# Altium PCB transboard-v1.1.PcbDoc
Units mil, origin at the board's own origin, x right, y up, seen from the top; angles counter-clockwise.
Board outline 2670 x 2110 mil, 2 copper layers (Top Layer, Bottom Layer); 13 components, 17 nets, 118 pads, 1 vias.
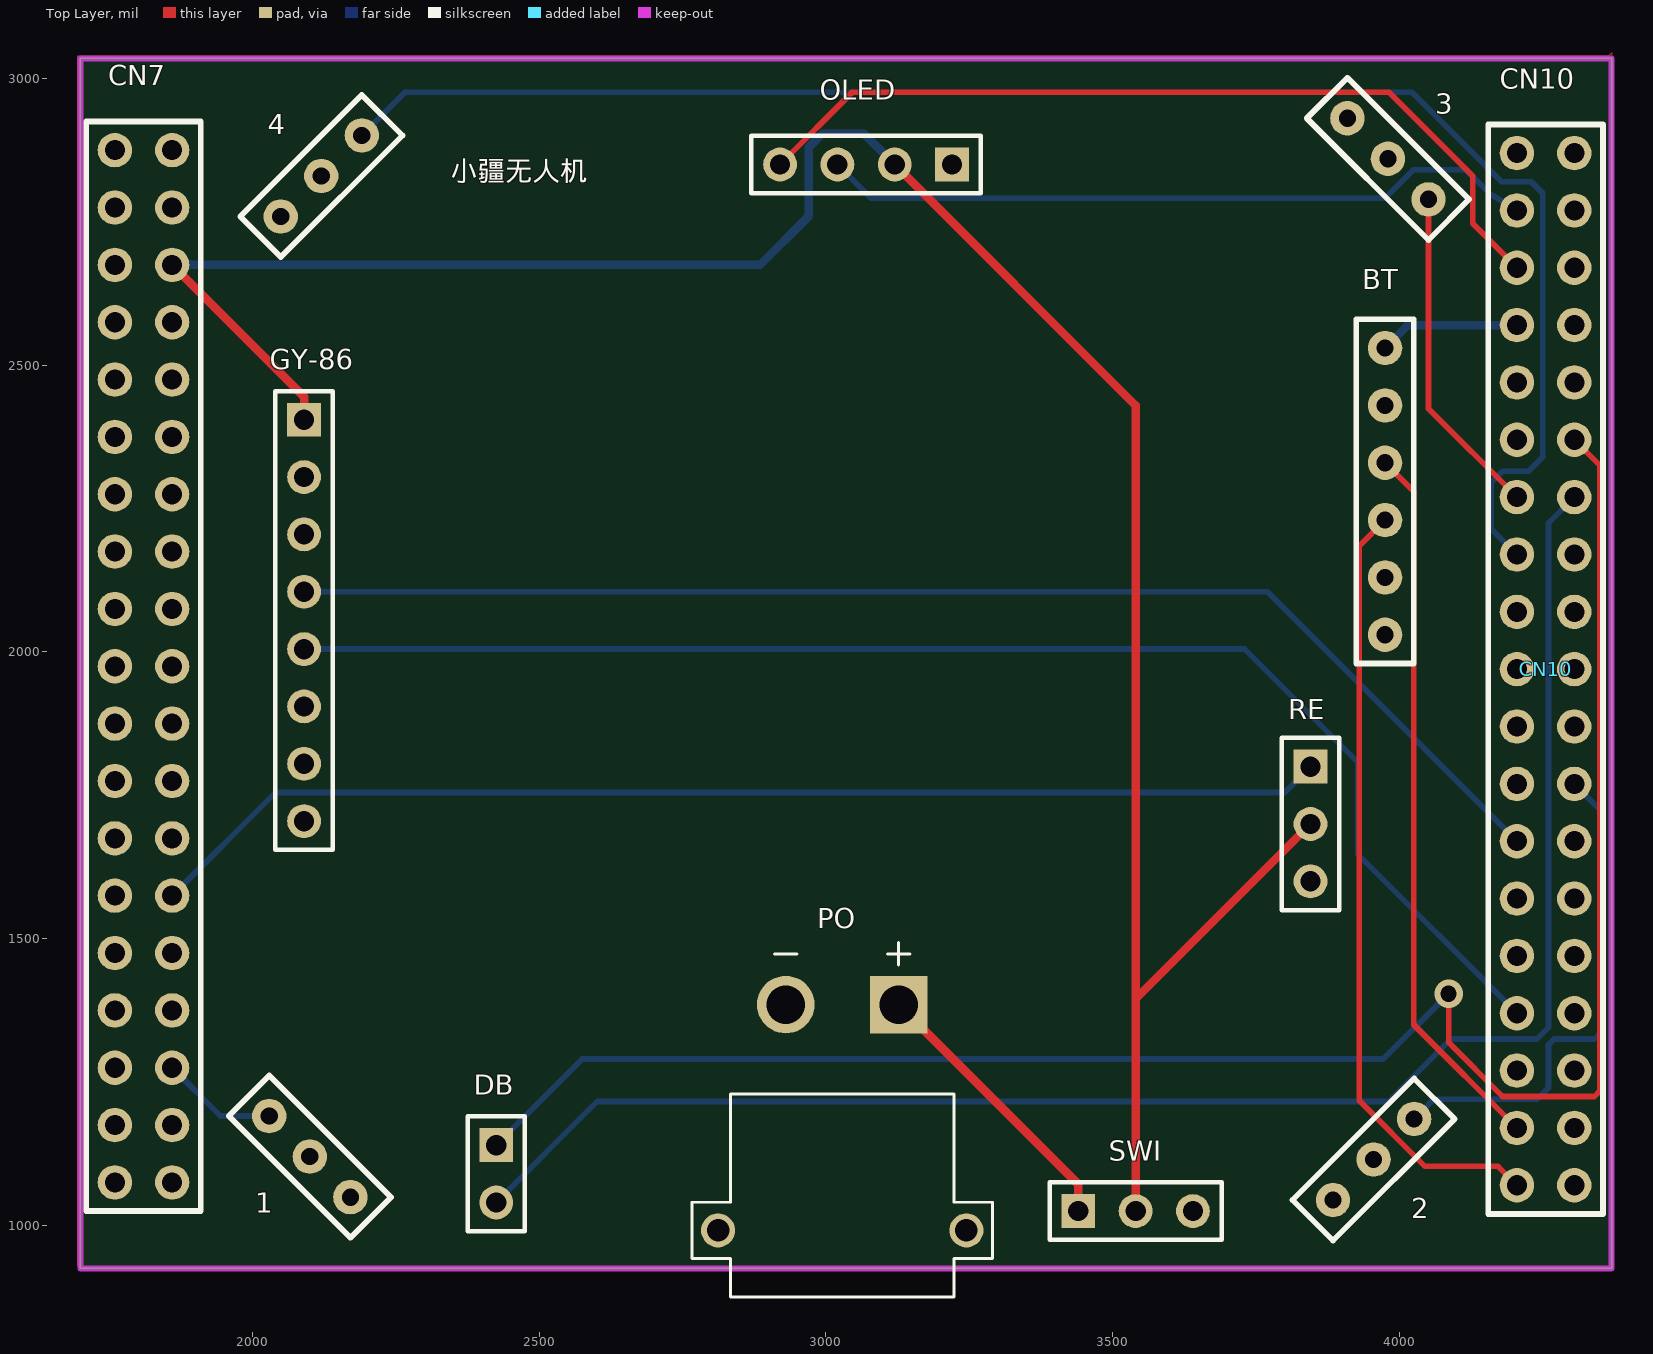
[diagram p0: Top Layer view]
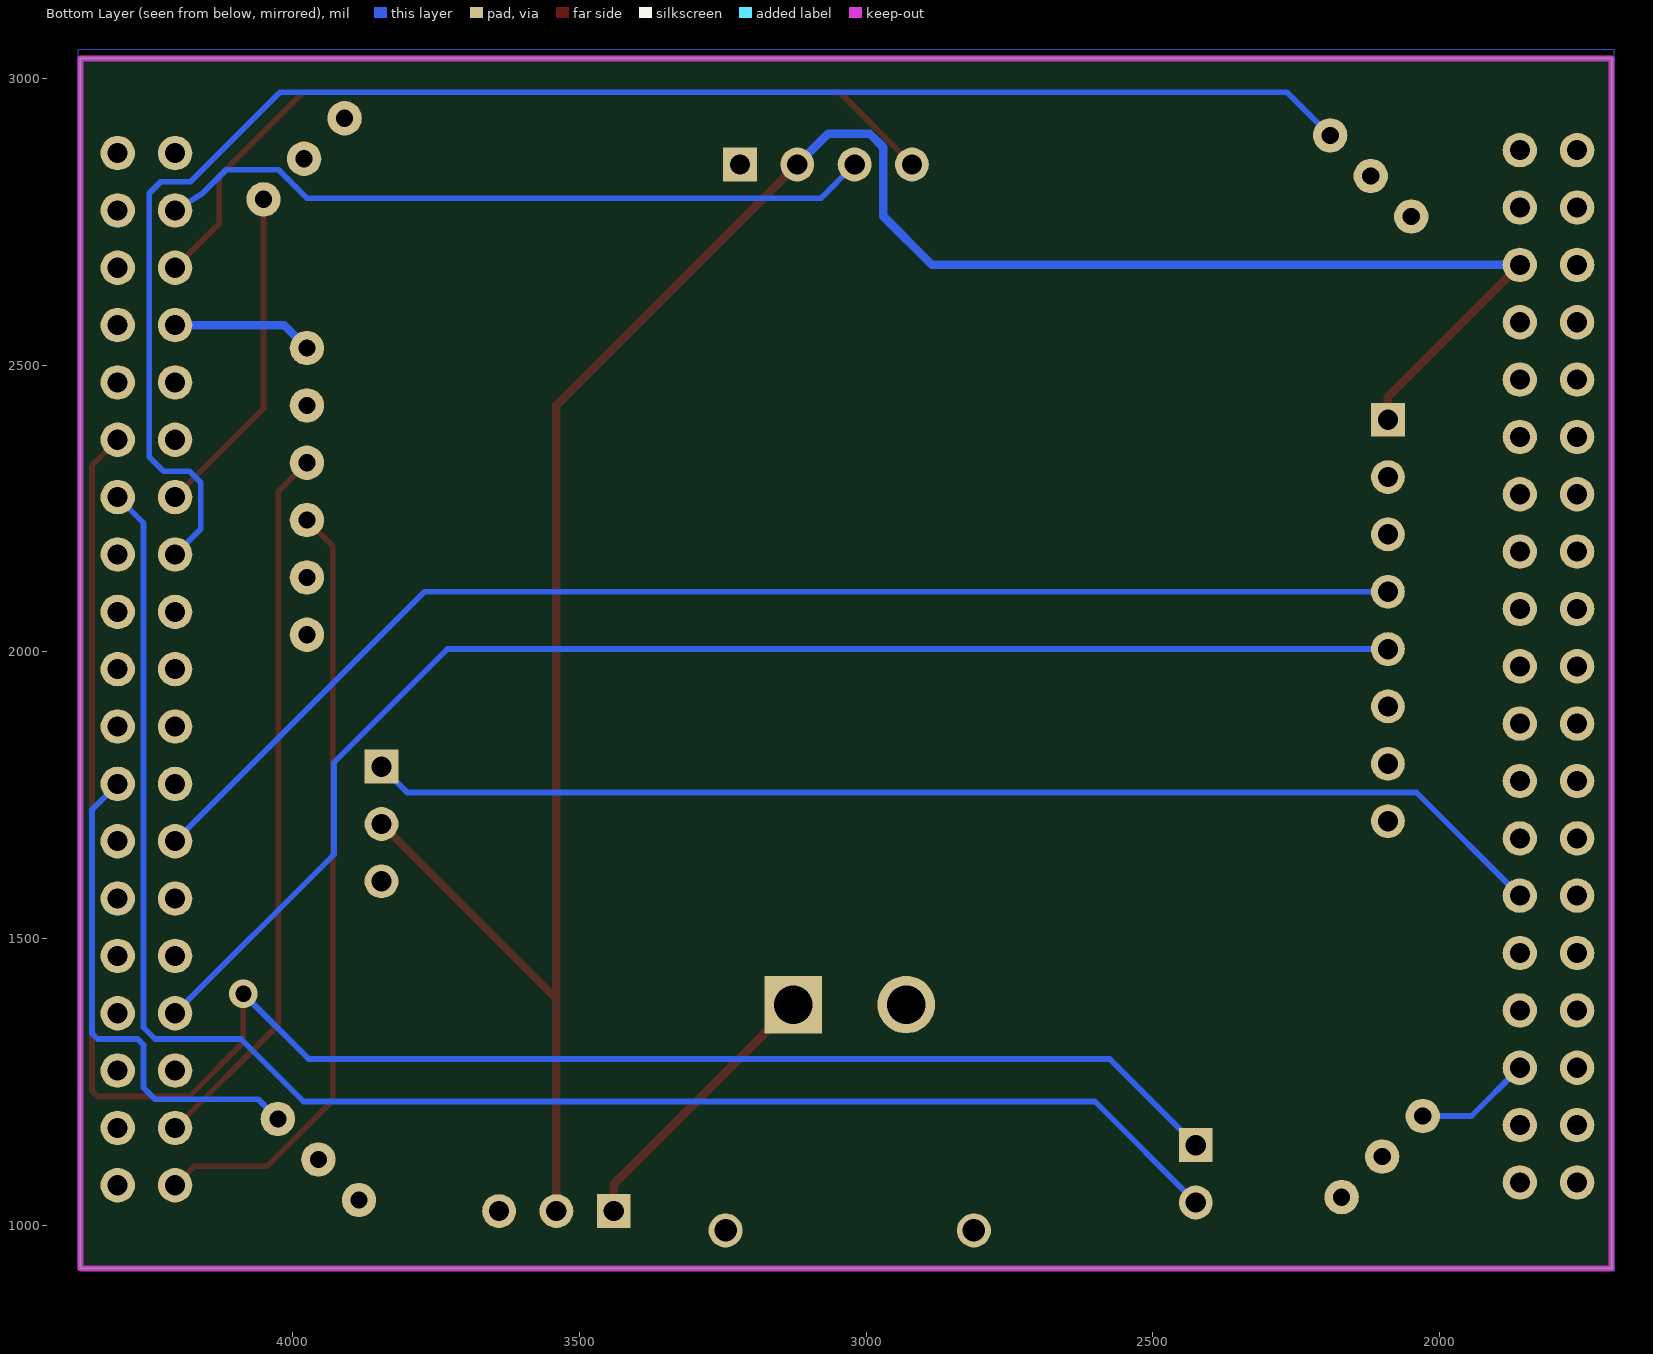
[diagram p1: Bottom Layer view, seen from below]

## Layer stack, top to bottom
Top Solder: solder mask 0.4, Solder Resist, Dk 3.5
Top Layer: signal copper 1.4
Dielectric 1: dielectric 12.6, FR-4, Dk 4.8
Bottom Layer: signal copper 1.4
Bottom Solder: solder mask 0.4, Solder Resist, Dk 3.5

## Board outline
1700,925 1700,3035 4370,3035 4370,925

## Design rules (kind name [scope] priority, off if disabled: settings)
AssemblyTestPointUsage [All] p0: scope1count=1 scope1_0_kind=Board scope1_0_value=Board scope2count=1 scope2_0_kind=Board scope2_0_value=Board commentlength=0
AssemblyTestpoint [All] p0: scope1count=1 scope1_0_kind=Board scope1_0_value=Board scope2count=1 scope2_0_kind=Board scope2_0_value=Board commentlength=0
Clearance [All] p0: scope1count=1 scope1_0_kind=Board scope1_0_value=Board scope2count=1 scope2_0_kind=Board scope2_0_value=Board commentlength=0 gap=10
Clearance [All] p1: gap=10 ignorepadtopadclearanceinfootprint=FALSE
ComponentClearance [All] p0: scope1count=1 scope1_0_kind=Board scope1_0_value=Board scope2count=1 scope2_0_kind=Board scope2_0_value=Board commentlength=0 gap=10 collisioncheckmode=3
DiffPairsRouting [All] p0: scope1count=1 scope1_0_kind=Board scope1_0_value=Board scope2count=1 scope2_0_kind=Board scope2_0_value=Board commentlength=0
FabricationTestPointUsage [All] p0: scope1count=1 scope1_0_kind=Board scope1_0_value=Board scope2count=1 scope2_0_kind=Board scope2_0_value=Board commentlength=0 valid=0 allowmultiple=FALSE
FabricationTestpoint [All] p0: scope1count=1 scope1_0_kind=Board scope1_0_value=Board scope2count=1 scope2_0_kind=Board scope2_0_value=Board commentlength=0 side=3 testpointundercomponent=TRUE minsize=40 maxsize=100 preferedsize=60 minholesize=0 maxholesize=40 preferedholesize=32 testpointgrid=1
FanoutControl Fanout_BGA [All] p0 off: scope1count=1 scope1_0_kind=Board scope1_0_value=Board scope2count=1 scope2_0_kind=Board scope2_0_value=Board commentlength=69 // Protel DXP Scope 1 Expression Was: IsBGA   Fanout_BGA (Default Rule)
FanoutControl Fanout_LCC [All] p0 off: scope1count=1 scope1_0_kind=Board scope1_0_value=Board scope2count=1 scope2_0_kind=Board scope2_0_value=Board commentlength=69 // Protel DXP Scope 1 Expression Was: IsLCC   Fanout_LCC (Default Rule)
FanoutControl Fanout_SOIC [All] p0 off: scope1count=1 scope1_0_kind=Board scope1_0_value=Board scope2count=1 scope2_0_kind=Board scope2_0_value=Board commentlength=71 // Protel DXP Scope 1 Expression Was: IsSOIC   Fanout_SOIC (Default Rule)
FanoutControl Fanout_Small [All] p0 off: scope1count=1 scope1_0_kind=Board scope1_0_value=Board scope2count=1 scope2_0_kind=Board scope2_0_value=Board commentlength=84 // Protel DXP Scope 1 Expression Was: (CompPinCount < 5)   Fanout_Small (Default Rule)
FanoutControl Fanout_Default [All] p0: scope1count=1 scope1_0_kind=Board scope1_0_value=Board scope2count=1 scope2_0_kind=Board scope2_0_value=Board commentlength=30 // Fanout_Default (Default Rule)
Height [All] p0: scope1count=1 scope1_0_kind=Board scope1_0_value=Board scope2count=1 scope2_0_kind=Board scope2_0_value=Board commentlength=0
HoleSize [All] p0: scope1count=1 scope1_0_kind=Board scope1_0_value=Board scope2count=1 scope2_0_kind=Board scope2_0_value=Board commentlength=0 absolutevalues=TRUE maxlimit=100 minlimit=1 maxpercent=80.000 minpercent=20.000
HoleToHoleClearance [All] p0: scope1count=1 scope1_0_kind=Board scope1_0_value=Board scope2count=1 scope2_0_kind=Board scope2_0_value=Board commentlength=0
LayerPairs [All] p0: scope1count=1 scope1_0_kind=Board scope1_0_value=Board scope2count=1 scope2_0_kind=Board scope2_0_value=Board commentlength=0 enforce=TRUE
MinimumSolderMaskSliver [All] p0: scope1count=1 scope1_0_kind=Board scope1_0_value=Board scope2count=1 scope2_0_kind=Board scope2_0_value=Board commentlength=0
NetAntennae [All] p0: scope1count=1 scope1_0_kind=Board scope1_0_value=Board scope2count=1 scope2_0_kind=Board scope2_0_value=Board commentlength=0
PasteMaskExpansion [All] p0: scope1count=1 scope1_0_kind=Board scope1_0_value=Board scope2count=1 scope2_0_kind=Board scope2_0_value=Board commentlength=0 expansion=0
PlaneClearance [All] p0: scope1count=1 scope1_0_kind=Board scope1_0_value=Board scope2count=1 scope2_0_kind=Board scope2_0_value=Board commentlength=0 clearance=20
PlaneConnect [All] p0: scope1count=1 scope1_0_kind=Board scope1_0_value=Board scope2count=1 scope2_0_kind=Board scope2_0_value=Board commentlength=0 planeconnectstyle=Relief reliefexpansion=20 reliefentries=4 reliefconductorwidth=10 reliefairgap=10
PolygonConnect [All] p0: scope1count=1 scope1_0_kind=Board scope1_0_value=Board scope2count=1 scope2_0_kind=Board scope2_0_value=Board commentlength=0 connectstyle=Relief reliefconductorwidth=10 reliefentries=4 polygonreliefangle="90 Angle"
PolygonConnect [All] p1: connectstyle=Relief reliefconductorwidth=10 reliefentries=4 polygonreliefangle="90 Angle" airgapwidth=10
RoutingCorners [All] p0: scope1count=1 scope1_0_kind=Board scope1_0_value=Board scope2count=1 scope2_0_kind=Board scope2_0_value=Board commentlength=0 cornerstyle=45-Degree minsetback=100 maxsetback=100
RoutingLayers [All] p0: scope1count=1 scope1_0_kind=Board scope1_0_value=Board scope2count=1 scope2_0_kind=Board scope2_0_value=Board commentlength=0 top layer=Automatic bottom layer=Automatic
RoutingPriority [All] p0: scope1count=1 scope1_0_kind=Board scope1_0_value=Board scope2count=1 scope2_0_kind=Board scope2_0_value=Board commentlength=0
RoutingTopology [All] p0: scope1count=1 scope1_0_kind=Board scope1_0_value=Board scope2count=1 scope2_0_kind=Board scope2_0_value=Board commentlength=0 topology=Shortest
RoutingVias [All] p0: scope1count=1 scope1_0_kind=Board scope1_0_value=Board scope2count=1 scope2_0_kind=Board scope2_0_value=Board commentlength=0 holewidth=28 width=50 viastyle="Through Hole" minholewidth=28 minwidth=50 maxholewidth=28 maxwidth=50
RoutingVias [All] p1: holewidth=28 width=50 viastyle="Through Hole" minholewidth=28 minwidth=50 maxholewidth=28 maxwidth=50
ShortCircuit [All] p0: scope1count=1 scope1_0_kind=Board scope1_0_value=Board scope2count=1 scope2_0_kind=Board scope2_0_value=Board commentlength=0 allowed=FALSE
SilkToBoardRegionClearance [All] p0: scope1count=1 scope1_0_kind=Board scope1_0_value=Board scope2count=1 scope2_0_kind=Board scope2_0_value=Board commentlength=0
SilkToSilkClearance [All] p0: scope1count=1 scope1_0_kind=Board scope1_0_value=Board scope2count=1 scope2_0_kind=Board scope2_0_value=Board commentlength=0
SilkToSolderMaskClearance [All] p0 off: scope1count=1 scope1_0_kind=Board scope1_0_value=Board scope2count=1 scope2_0_kind=Board scope2_0_value=Board commentlength=44 // Protel DXP Scope 1 Expression Was: IsPad
SolderMaskExpansion [All] p0: scope1count=1 scope1_0_kind=Board scope1_0_value=Board scope2count=1 scope2_0_kind=Board scope2_0_value=Board commentlength=0 expansion=4
SolderMaskExpansion [All] p1: expansion=4 istentingtop=FALSE
UnRoutedNet [All] p0: scope1count=1 scope1_0_kind=Board scope1_0_value=Board scope2count=1 scope2_0_kind=Board scope2_0_value=Board commentlength=0
UnpouredPolygon [All] p0: scope1count=1 scope1_0_kind=Board scope1_0_value=Board scope2count=1 scope2_0_kind=Board scope2_0_value=Board commentlength=0
Width Width_1 [All] p0 off: scope1count=1 scope1_0_kind=Board scope1_0_value=Board scope2count=1 scope2_0_kind=Board scope2_0_value=Board commentlength=98 maxlimit=20 minlimit=10 preferedwidth=15 // Protel DXP Scope 1 Expression Was: (InNet('5V') OR InNet('3V3') OR InNet('GND') OR InNet('P'))
Width [All] p0: scope1count=1 scope1_0_kind=Board scope1_0_value=Board scope2count=1 scope2_0_kind=Board scope2_0_value=Board commentlength=0 maxlimit=16 minlimit=10 preferedwidth=10
Width Width_1 [(InNet('5V') OR InNet('3V3') OR InNet('GND') OR InNet('P'))] p1: maxlimit=20 minlimit=10 preferedwidth=15
Width [All] p2: maxlimit=16 minlimit=10 preferedwidth=10
30 further rules are at their usual default settings.

## Classes and differential pairs
component class transboard: 3 4 CN7 CN10 DB GY-86

## Components (designator, comment, footprint, x,y, rotation, side; value= is the part's Value field where it differs from the comment)
1 "" M 2029.29,1190.71 r45 top locked
2 "MOTOR" M 4025.71,1185.71 r315 top locked
3 "MOTOR" M 4050.71,2789.29 r225 top locked
4 "MOTOR" M 2190.71,2900.71 r315 top locked
BT1 "Bluetooth" Bluetooth 3975,2030 r180 top locked
CN7 "CN7" CN7 1760,1075 r0 top locked
CN10 "CN10" CN10 4305,1070 r0 top locked
DB "Debug" HDR1X2 2425,1140 r270 top locked
GY-86 "GY-86" HDR1X8 2090,2405 r270 top locked
OLED "OLED" HDR1X4 3220,2850 r180 top locked (schematic designator OLED1)
PO "XT30PW-M" AMASS_XT30PW-M 3028.42,991.3 r180 top locked (schematic designator PO1)
RE "RECEIVE" HDR1X3 3845,1800 r270 top locked (schematic designator RE1)
SWI "SWITCH" HDR1X3 3440,1025 r0 top locked (schematic designator SWI1)

## Footprints (in the part's own frame and the unit in brackets; to place one, negate y for a bottom-side part, rotate by r counter-clockwise, add the part's x,y. Pads: shape width x height; smd on the part's side, far side on the other; paste and mask are expansions set on the pad)
AMASS_XT30PW-M [mm]
  round 2.55 hole 1.7: N(2.5,-10)
  rect 2.55x2.55 / inner round 2.55 / far side rect 2.55x2.55 hole 1.7: P(-2.5,-10)
  round 1.508 hole 1: S1(5.5,0) S2(-5.5,0)
  silkscreen extent -6.65,-12.75 6.65,2.95
Bluetooth [mil]
  round 60 hole 30: 1(0,0) 2(0,-100) 3(0,-200) 4(0,-300) 5(0,-400) 6(0,-500)
  silkscreen extent -50,-550 50,50
CN7 [mil]
  round 60 hole 35: 1(0,1800) 2(100,1800) 3(0,1700) 4(100,1700) 5(0,1600) 6(100,1600) 7(0,1500) 8(100,1500) 9(0,1400) 10(100,1400) 11(0,1300) 12(100,1300) 13(0,1200) 14(100,1200) 15(0,1100) 16(100,1100) 17(0,1000) 18(100,1000) 19(0,900) 20(100,900) 21(0,800) 22(100,800) 23(0,700) 24(100,700) 25(0,600) 26(100,600) 27(0,500) 28(100,500) 29(0,400) 30(100,400) 31(0,300) 32(100,300) 33(0,200) 34(100,200) 35(0,100) 36(100,100) 37(0,0) 38(100,0)
  silkscreen extent -50,-50 150,1850
CN10 [mil]
  round 60 hole 35: 1(-100,1800) 2(0,1800) 3(-100,1700) 4(0,1700) 5(-100,1600) 6(0,1600) 7(-100,1500) 8(0,1500) 9(-100,1400) 10(0,1400) 11(-100,1300) 12(0,1300) 13(-100,1200) 14(0,1200) 15(-100,1100) 16(0,1100) 17(-100,1000) 18(0,1000) 19(-100,900) 20(0,900) 21(-100,800) 22(0,800) 23(-100,700) 24(0,700) 25(-100,600) 26(0,600) 27(-100,500) 28(0,500) 29(-100,400) 30(0,400) 31(-100,300) 32(0,300) 33(-100,200) 34(0,200) 35(-100,100) 36(0,100) 37(-100,0) 38(0,0)
  silkscreen extent -150,-50 50,1850
HDR1X2 [mm] "Connector; Header; 2 Position"
  rect 1.5x1.5 hole 0.9: 1(0,0)
  round 1.5 hole 0.9: 2(2.54,0)
  silkscreen extent -1.27,-1.27 3.81,1.27
HDR1X3 [mm]
  rect 1.5x1.5 hole 0.9: 1(0,0)
  round 1.5 hole 0.9: 2(2.54,0) 3(5.08,0)
  silkscreen extent -1.27,-1.27 6.35,1.27
HDR1X4 [mm]
  rect 1.5x1.5 hole 0.9: 1(0,0)
  round 1.5 hole 0.9: 2(2.54,0) 3(5.08,0) 4(7.62,0)
  silkscreen extent -1.27,-1.27 8.89,1.27
HDR1X8 [mm] "Connector; Header; 8 Position"
  rect 1.5x1.5 hole 0.9: 1(0,0)
  round 1.5 hole 0.9: 2(2.54,0) 3(5.08,0) 4(7.62,0) 5(10.16,0) 6(12.7,0) 7(15.24,0) 8(17.78,0)
  silkscreen extent -1.27,-1.27 19.05,1.27
M [mil]
  round 60 hole 30: 1(0,0) 2(0,-100) 3(0,-200)
  silkscreen extent -50,-250 50,50

## Part data
1 2 3 4: library part M
DB: library part "Header 2", "Header, 2-Pin"
OLED: library part "Header 4", "Header, 4-Pin"
PO: "Socket; DC supply; XT30; male; PIN: 2; on PCBs; THT; Colour: yellow"
RE: library part "Header 3", "Header, 3-Pin"
SWI: library part "Header 3_1", "Header, 3-Pin"

## Via types
v1: diameter 50, hole 28, Top Layer to Bottom Layer, 1 vias

## Nets (pads, with @x,y where several pads share a name; then routed paths per layer and width w, separated by ;. In a path a pad name is that pad's centre, name@x,y a point inside that pad or via, vN(x,y) a via of type N, cw(c..) or ccw(c..) an arc to the next point about the centre after c; other vN are vias at no path point)
3V3: BT1.6 CN10.7 | length 246.6
  Bottom Layer w15: BT1.6 4015,2570 CN10.7
5V: CN7.6 GY-86.1 OLED.2 RE.2 SWI.2 | length 4243.1
  Top Layer w15: CN7.6 2090,2445 GY-86.1 ; OLED.2 3540,2430 3540,1395 ; SWI.2 3540,1395 ; RE.2 3540,1395
  Bottom Layer w15: CN7.6 2885,2675 2970,2760 2970,2880 2994,2904 3066,2904 OLED.2
GND: 1.3 2.3 3.3 4.3 BT1.5 CN7.20 GY-86.3 OLED.1 PO.N RE.3 SWI.3
P: PO.P SWI.1 | length 489.7
  Top Layer w15: PO.P 3440,1071.85 SWI.1
PA0: CN7.28 RE.1 | length 2078.2
  Bottom Layer w10: CN7.28 2040,1755 3800,1755 RE.1
PA2: BT1.4 CN10.35 | length 1255.3
  Top Layer w10: BT1.4 4025,2280 4025,1350 CN10.35
PA3: BT1.3 CN10.37 | length 1367.1
  Top Layer w10: BT1.3 3930,2185 3930,1217.78 4044.78,1103 4172,1103 CN10.37
PA6: 3.1 CN10.13 | length 583.2
  Top Layer w10: 3.1 4050.71,2424.29 CN10.13
PA7: 4.1 CN10.15 | length 2875.7
  Bottom Layer w10: 4.1 2266,2976 4022,2976 4178,2820 4230,2820 4250,2800 4250,2340 4225,2315 4180,2315 4160,2295 4160,2215 CN10.15
PA11: CN10.14 DB.2 | length 2905
  Bottom Layer w10: DB.2 2601,1216 3981,1216 4090,1325 4240,1325 4260,1345 4260,2225 CN10.14
PA12: CN10.12 DB.1 | length 3316.1
  Top Layer w10: v1(4086,1404) 4086,1319 4180,1225 4340,1225 4350,1235 4350,2325 CN10.12
  Bottom Layer w10: DB.1 2575,1290 3972,1290 v1(4086,1404)
PB0: 1.1 CN7.34 | length 204.2
  Bottom Layer w10: CN7.34 1944.29,1190.71 1.1
PB1: 2.1 CN10.24 | length 883.7
  Bottom Layer w10: 2.1 4060,1220 4240,1220 4260,1240 4260,1315 4270,1325 4340,1325 4350,1335 4350,1725 CN10.24
PB3: CN10.31 GY-86.5 | length 2471.8
  Bottom Layer w10: GY-86.5 3730,2005 3928,1807 3928,1647 CN10.31
PB8: CN10.3 OLED.3 | length 1255.8
  Bottom Layer w10: OLED.3 3079,2791 3974.64,2791 4024.64,2841 4115.8,2841 4158.32,2798.48 CN10.3
PB9: CN10.5 OLED.4 | length 1512.6
  Top Layer w10: OLED.4 3046,2976 3982,2976 4128,2830 4128,2747 CN10.5
PB10: CN10.25 GY-86.4 | length 2295.2
  Bottom Layer w10: GY-86.4 3770,2105 CN10.25
pads on no net: 1.2 2.2 3.2 4.2 BT1.1 BT1.2 CN7.1 CN7.2 CN7.3 CN7.4 CN7.5 CN7.7 CN7.8 CN7.9 CN7.10 CN7.11 CN7.12 CN7.13 CN7.14 CN7.15 CN7.16 CN7.17 CN7.18 CN7.19 CN7.21 CN7.22 CN7.23 CN7.24 CN7.25 CN7.26 CN7.27 CN7.29 CN7.30 CN7.31 CN7.32 CN7.33 CN7.35 CN7.36 CN7.37 CN7.38 CN10.1 CN10.2 CN10.4 CN10.6 CN10.8 CN10.9 CN10.10 CN10.11 CN10.16 CN10.17 CN10.18 CN10.19 CN10.20 CN10.21 CN10.22 CN10.23 CN10.26 CN10.27 CN10.28 CN10.29 CN10.30 CN10.32 CN10.33 CN10.34 CN10.36 CN10.38 GY-86.2 GY-86.6 GY-86.7 GY-86.8 PO.S1 PO.S2

## Polygon pours and split planes (outlines as drawn)
GND on Top Layer "GND_L01_P000" (solid, remove dead copper, pour order 0): 1695,3040 4365,3040 4370,3045 4370,925 1700,925 1695,930
GND on Bottom Layer "GND_L02_P002" (solid, remove dead copper, pour order 2): 1695,3050 4375,3050 4375,925 1700,925 1695,920

## Keep-outs
Keep-Out Layer:
  the board outline again, w10

## Silkscreen, mask and mechanical layers (free items; w line width, h text height)
Top Overlay:
  text "小疆无人机" at 2345,2809.3 h60

## Text inside footprints (layer, text, board x,y; h text height)
BT1: Top Overlay "BT" at 3935,2620 h60
PO: Mechanical 13 "MOTOR" at 1904.26,857 h60